# Altium PCB PCB robot V3.PCBDOC (part 2 of 3)
Units mm, origin at the board's own origin, x right, y up, seen from the top; angles counter-clockwise.
Board outline 299.72 x 199.9 mm, 2 copper layers (Top Layer, Bottom Layer); 127 components, 116 nets, 527 pads, 274 vias.
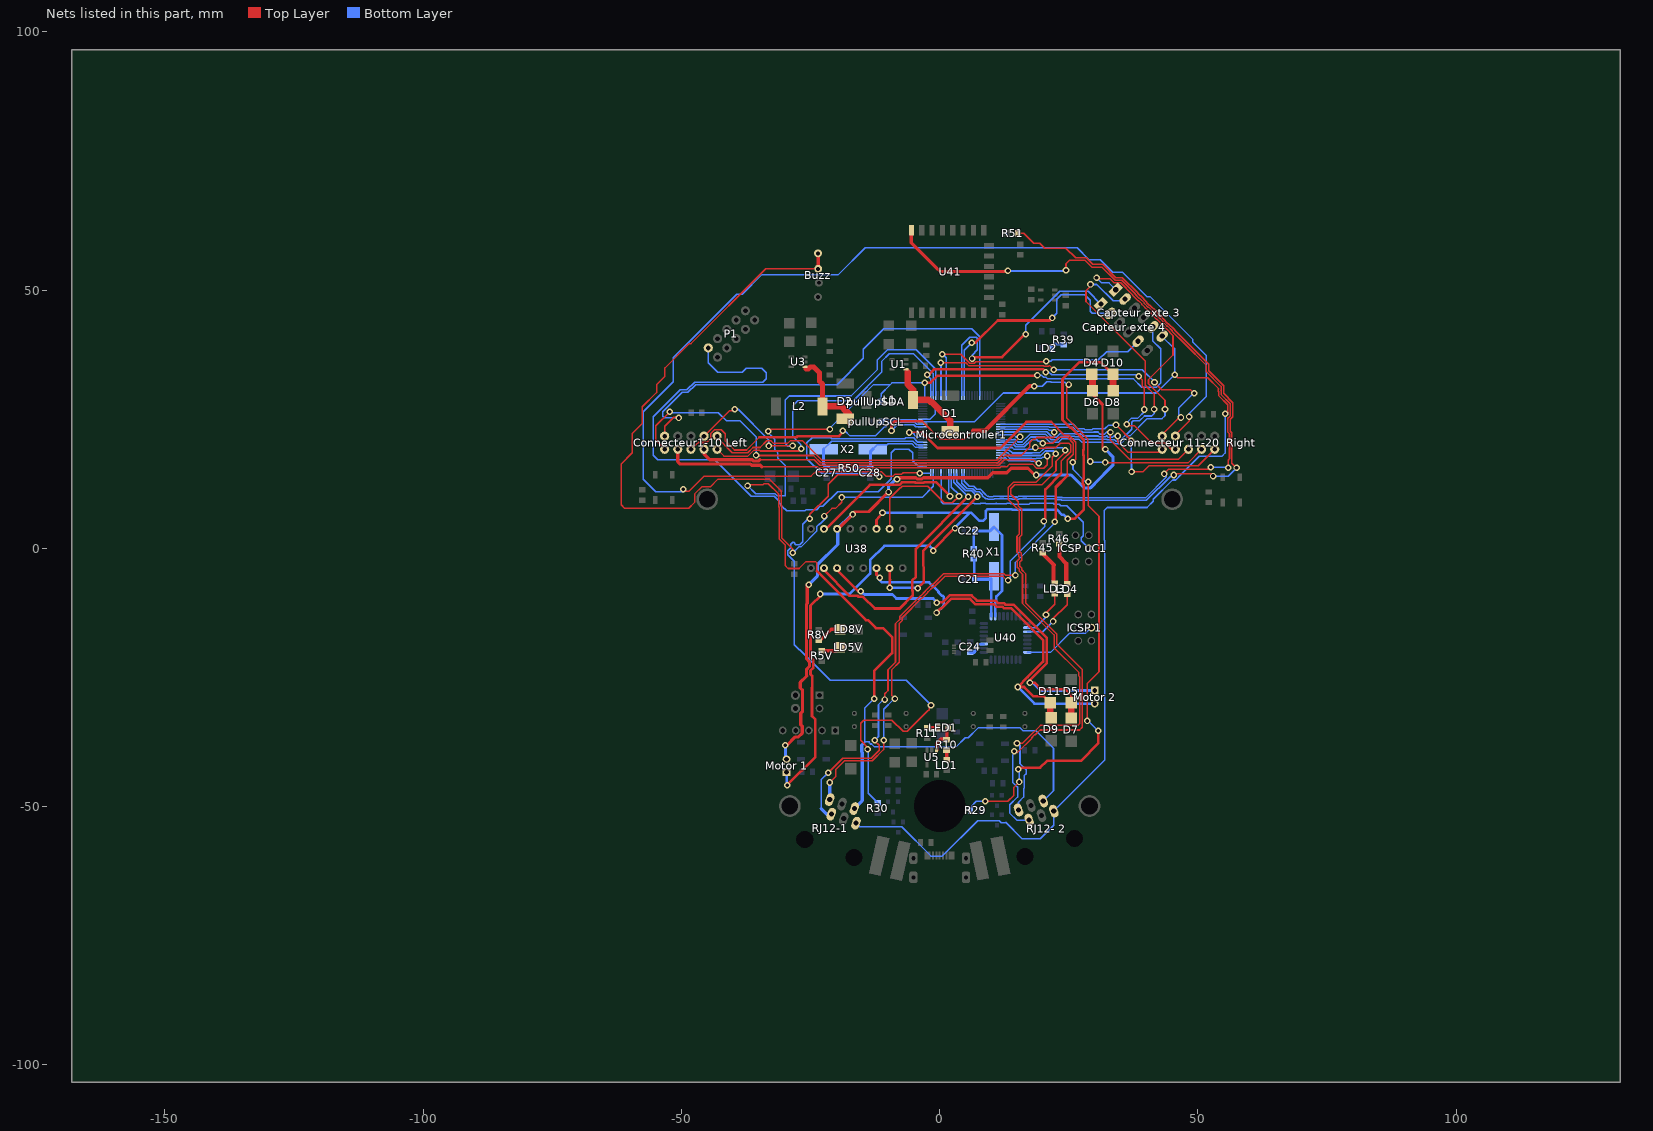
[diagram p2: the nets of this part, all layers, seen from the top]

## Via types
v1: diameter 1.27, hole 0.711, Top Layer to Bottom Layer, 274 vias

## Nets (pads, with @x,y where several pads share a name; then routed paths per layer and width w, separated by ;. In a path a pad name is that pad's centre, name@x,y a point inside that pad or via, vN(x,y) a via of type N, cw(c..) or ccw(c..) an arc to the next point about the centre after c; other vN are vias at no path point) (continued)
MOSI: "ICSP uC1.4" MicroController1.21 | length 40.7
  Bottom Layer w0.254: MicroController1.21@0.255,14.472 0.255,9.04 0.691,8.604 6.078,8.604 6.157,8.682 6.643,8.682 6.722,8.604 7.878,8.604 7.957,8.682 8.936,8.682 8.963,8.655 10.898,8.655 10.925,8.682 11.052,8.682 11.06,8.674 12.995,8.674 13.003,8.682 13.624,8.682 13.722,8.584 14.351,8.584 14.369,8.567 17.306,8.567 17.422,8.682 22.003,8.682 22.199,8.486 23.146,8.486 23.397,8.235 24.605,8.235 27.774,5.066 27.774,2.466 27.37,2.062 27.37,1.456 28.847,-0.021
"MOSI 16": "ICSP 1.4" U40.16 | length 14.4
  Bottom Layer w0.305: U40.16@16.958,-20.145 21.453,-20.145 25.138,-16.459 28.248,-16.459 29.361,-15.346
"MOTOR1 IN 1": MicroController1.18 U38.2 | length 33.8
  Top Layer w0.508: U38.2@-22.4,3.775 -22.049,3.775 -13.527,12.297 -8.727,12.297 -8.71,12.28 -7.815,12.28 -7.334,12.761 -4.764,12.761 -4.663,12.659 -3.107,12.659 -3.006,12.761 -0.666,12.761 v1(1.995,10.1)
  Bottom Layer w0.254: MicroController1.18@1.755,14.472 1.755,10.34 v1(1.995,10.1)
"MOTOR1 IN 2": MicroController1.17 U38.7 | length 27.2
  Top Layer w0.254: U38.7@-9.7,3.775 -9.7,9.667 -7.659,11.707 -7.577,11.707 -7.295,11.99 -2.278,11.99 0.891,8.821 2.461,8.821 v1(3.74,10.1)
  Bottom Layer w0.254: MicroController1.17@2.255,14.472 2.255,11.825 3.74,10.34 v1(3.74,10.1) v1@3.74,10.03
"MOTOR1 OUT+": "Motor 1.2" D4.1 D6.2 U38.3 | length 134.4
  Top Layer w0.381: v1@31.494,19.157 31.494,27.866
  Top Layer w0.508: v1@-16.527,7.107 -13.724,7.107
  Top Layer w0.605: v1@-29.496,-38.071 -27.929,-36.504 -27.341,-36.504 -26.611,-35.774 -26.611,-34.42 -26.89,-34.141 -26.89,-31.906 -26.543,-31.56 -26.543,-27.481 -26.936,-27.089 ; -26.985,-27.04 -26.985,-25.957 -25.738,-24.71 -25.751,-24.697 -25.751,-23.381 -25.238,-22.868 -25.238,-21.933 -25.751,-21.42 -25.751,-10.761 -25.642,-10.653 -25.642,-7.06 v1(-25.358,-7.06) ; U38.3@-19.86,3.775 -19.605,3.775 v1(-16.82,6.559) ; -13.724,7.107 v1@-10.031,10.801 ; v1(-8.263,13.361) -7.956,13.668 -4.613,13.668 -4.353,13.408 -3.417,13.408 -3.157,13.668 9.327,13.668 10.277,14.618 12.969,14.618 13.846,15.496 17.107,15.496 v1@18.455,14.148 ; D6.2@29.58,30.52 29.58,29.78 31.494,27.866
  Top Layer w1.27: D4.1@29.47,33.68 29.58,33.57 D6.2@29.58,30.52
  Bottom Layer w0.605: v1(-29.866,-38.095) -29.866,-40.594 -29.65,-40.81 ; v1(-25.358,-7.06) -23.685,-5.388 -23.685,-3.206 -19.733,0.747 U38.3@-19.733,3.647 ; U38.3@-19.86,3.775 -17.075,6.559 v1(-16.82,6.559) ; v1(-9.898,10.887) -9.898,12.02 v1@-8.622,13.296 ; v1(18.662,14.189) 25.45,14.189 27.934,11.705 29.226,11.705 29.915,12.394 29.915,12.445 33.522,16.051 33.522,17.748 v1@32.238,19.032
  other v1: 32.088,19.169
"MOTOR1 OUT-": "Motor 1.1" D8.2 D10.1 U38.6 | length 169.6
  Top Layer w0.508: v1(-29.521,-45.852) -24.12,-40.45 -24.12,-33.085 -24.72,-32.485 -24.72,-26.981 -24.679,-26.941 -24.679,-24.71 -25.003,-24.387 -25.003,-23.691 -24.49,-23.178 -24.49,-21.623 -25.003,-21.11 -25.003,-11.072 v1@-22.922,-8.991 ; U38.6@-12.24,3.775 -12.24,5.474 v1(-11.073,6.897) ; v1@-1.245,-0.209 v1@2.808,3.844 ; v1(24.798,5.717) 26.133,5.717 27.906,7.491 27.906,12.213 27.706,12.413 27.706,13.309 27.906,13.509 27.906,17.973 27.767,18.112 27.767,19.008 27.904,19.145 ; 27.904,19.145 27.906,19.148 27.906,20.934 25.526,23.315 25.303,23.315 23.775,24.843 23.775,32.737 27.079,36.041 31.169,36.041 D10.1@33.545,33.665
  Top Layer w1.27: D10.1@33.545,33.665 33.545,30.555 D8.2@33.58,30.52
  Bottom Layer w0.508: -29.65,-43.35 -29.57,-43.429 v1@-29.57,-45.458 ; v1(-23.095,-8.844) -17.412,-8.844 -13.446,-4.877 -13.446,-2.252 -10.712,0.482 -1.936,0.482 v1@-1.245,-0.209 ; v1(-11.073,6.897) 5.861,6.897 ; v1@2.808,3.844 5.861,6.897 ; v1(24.798,5.717) 24.041,6.475 23.722,6.475 22.725,7.471 14.029,7.471 13.93,7.569 9.253,7.569 8.951,7.267 8.951,5.869 8.441,5.359 7.644,5.359 6.107,6.897 5.861,6.897
  other v1: -1.268,-0.463 2.969,3.866
"MOTOR2 IN1": MicroController1.16 U38.10 | length 51
  Top Layer w0.508: U38.10@-22.4,-3.845 -22.4,-4.215 -17.415,-9.2 -15.918,-9.2 -15.715,-9.403 -14.819,-9.403 -12.569,-11.653 -7.732,-11.653 -5.222,-9.144 -5.222,-8.256 -5.331,-8.147 -5.331,-6.228 -4.619,-5.516 -4.619,-0.119 v1(5.5,10)
  Bottom Layer w0.254: MicroController1.16@2.755,14.472 2.755,12.745 v1(5.5,10)
"MOTOR2 IN2": MicroController1.15 U38.15 | length 38.7
  Top Layer w0.508: U38.15@-9.7,-3.845 U38.15@-9.7,-3.85 ; v1(-9.685,-7.612) -9.685,-6.185 -9.6,-6.1 -9.7,-6 U38.15@-9.7,-3.85 ; U38.15@-9.65,-3.8 U38.15@-9.7,-3.85 ; v1(-4.25,-7.699) -3.121,-6.569 -3.15,-0.45 v1(7.3,10)
  Bottom Layer w0.254: MicroController1.15@3.255,14.472 3.255,12.877 5.032,11.1 6.2,11.1 v1(7.3,10)
  Bottom Layer w0.508: v1(-9.685,-7.612) -4.337,-7.612 v1(-4.25,-7.699)
"MOTOR2 OUT+": "Motor 2.1" D5.1 D7.2 U38.11 | length 82.7
  Top Layer w0.508: U38.11@-19.86,-3.845 -19.86,-4.194 -15.732,-8.322 v1(-15.267,-8.322) ; v1@-0.175,-10.409 0.593,-10.409 1.915,-9.087 6.161,-9.087 7.218,-10.145 10.796,-10.145 11.249,-10.598 12.427,-10.598 12.745,-10.916 14.273,-10.916 20.725,-17.368 20.725,-22.231 17.471,-25.485 v1(17.471,-26.017) 18.327,-26.017 19.609,-27.3 24.364,-27.3 25.44,-28.376 D5.1@25.44,-29.905
  Top Layer w1.27: D7.2@25.44,-32.775 D5.1@25.44,-29.905
  Bottom Layer w0.508: -14.768,-8.739 -14.564,-8.943 -9.176,-8.943 -8.409,-9.71 -1.272,-9.71 v1@-0.481,-10.501 ; v1@17.872,-25.911 19.475,-27.514 30.001,-27.514
  other v1: -0.54,-10.559
"MOTOR2 OUT-": "Motor 2.2" D9.2 D11.1 U38.14 | length 82.6
  Top Layer w0.508: U38.14@-12.24,-3.845 -12.24,-5.099 v1(-11.625,-5.714) ; v1(-0.61,-12.463) 0.276,-11.577 0.416,-11.577 2.205,-9.787 5.871,-9.787 6.928,-10.845 10.506,-10.845 10.959,-11.298 12.137,-11.298 12.455,-11.616 13.876,-11.616 20.025,-17.765 20.025,-21.942 17.03,-24.936 17.024,-24.936 15.121,-26.84 v1(15.121,-26.846) 16.35,-26.846 18.14,-28.636 20.171,-28.636 D11.1@21.44,-29.905
  Top Layer w1.27: D9.2@21.44,-32.615 D11.1@21.44,-29.905
  Bottom Layer w0.508: v1@-11.804,-5.948 -11.219,-6.533 -9.238,-6.533 -9.197,-6.574 -2.023,-6.574 -0.226,-8.37 -0.226,-8.549 0.406,-9.182 0.585,-9.182 0.763,-9.359 0.763,-11.138 0.715,-11.138 v1(-0.61,-12.463) ; v1(15.121,-26.846) 18.329,-30.054 30.001,-30.054
NetBuzz_0: Buzz.0 MicroController1.24 pad.0 | length 156
  Top Layer w0.305: -59.304,22.43 -59.498,22.236 -59.498,18.502 -61.66,16.34 -61.66,8.416 -61.013,7.769 -48.563,7.769 -47.444,8.889 -47.444,10.513 -46.013,11.944 -44.389,11.944 -42.998,13.334 -32.884,13.334 -30.668,11.119 -30.668,10.35 -30.661,10.343 -30.661,8.251 -30.556,8.147 -30.556,2 -28.428,-0.128 v1(-28.428,-0.877) ; -59.304,22.431 -57.583,24.151 -57.583,27.386 -54.8,30.169 -54.8,31.686 -53.194,33.292 -53.194,34.91 -48.472,39.633 -48.132,39.633 -33.662,54.103 pad.0@-23.515,54.103 ; v1(-22.357,6.243) -20.868,7.731 -20.179,7.731 -18.976,8.934 v1(-18.976,9.853)
  Top Layer w0.635: pad.0@-23.515,54.103 Buzz.0@-23.515,57.048
  Bottom Layer w0.305: v1(-28.428,-0.877) -27.28,0.271 -26.869,0.271 -23.836,3.304 -23.836,4.169 -23.237,4.767 -23.108,4.767 -21.859,6.016 -22.086,6.243 v1(-22.357,6.243) ; v1(-18.976,9.853) -3.391,9.853 -1.245,11.999 MicroController1.24@-1.245,14.472
NetC21_1: C21.1 R40.1 U40.1 X1.1 | length 14.5
  Bottom Layer w0.5: R40.1@6.595,-2.053 6.719,-2.177 C21.1@6.719,-5.983 ; U40.1@9.958,-13.145 X1.1@9.958,-5.931
  Bottom Layer w0.635: C21.1@6.719,-5.983 9.906,-5.983 X1.1@9.958,-5.931
NetC22_1: C22.1 R40.2 U40.2 X1.2 | length 26
  Bottom Layer w0.5: R40.2@6.595,-0.021 6.595,3.237 C22.1@6.719,3.361
  Bottom Layer w0.508: X1.2@10.509,4.12 12.059,2.571 12.059,-8.218 10.961,-9.315 10.961,-9.965 10.758,-10.168 U40.2@10.758,-13.145
  Bottom Layer w0.635: C22.1@6.719,3.361 9.75,3.361 X1.2@10.509,4.12
NetC24_2: C24.2 U40.27 | length 3.7
  Bottom Layer w0.508: 7.01,-19.049 7.515,-18.545 U40.27@8.558,-18.545
  Bottom Layer w0.635: C24.2@5.915,-20.113 6.677,-20.113 7.01,-19.78 7.01,-19.049
NetC27_1: C27.1 MicroController1.34 R50.2 X2.2 | length 27.3
  Bottom Layer w0.305: X2.2@-22.473,19.158 -20.906,20.725 -10.166,20.725 -8.113,20.725 -8.112,20.724 -5.149,20.724 -4.455,20.029 -3.302,20.029 MicroController1.34@-3.295,20.022
  Bottom Layer w0.635: X2.2@-22.473,19.158 -22.473,16.183 C27.1@-21.895,15.604 -21.768,15.477 R50.2@-18.547,15.477
NetC28_1: C28.1 MicroController1.33 R50.1 X2.1 | length 17.3
  Bottom Layer w0.305: X2.1@-12.973,19.158 -12.095,20.035 -10.156,20.035 -9.961,20.23 -8.318,20.23 -8.317,20.229 -5.364,20.229 -4.67,19.535 -4.254,19.535 -4.249,19.529 -3.502,19.529 -3.5,19.527 -3.3,19.527 MicroController1.33@-3.295,19.522
  Bottom Layer w0.635: R50.1@-16.515,15.477 -13.53,15.477 C28.1@-13.403,15.604 -13.403,18.728 X2.1@-12.973,19.158
"NetCapteur exte 1_1": MicroController1.93 RJ12-1.1 | length 115
  Top Layer w0.305: v1(-21.29,-45.331) -20.155,-44.197 -20.155,-42.84 -18.437,-41.122 -13.037,-41.122 -10.861,-38.946 -10.861,-37.521 v1@-10.598,-37.258 ; v1(-8.668,-29.095) -9.252,-28.511 -9.252,-23.471 -7.85,-22.07 -7.85,-14.564 -7.248,-13.962 -7.248,-13.421 -3.499,-9.672 -3.433,-9.672 -2.277,-8.516 -2.277,-8.45 -1.264,-7.437 -1.041,-7.437 0.959,-5.436 12.253,-5.436 v1@13.193,-6.375 ; v1(18.531,19.514) 18.686,19.359 20.33,19.359 20.485,19.514 22.479,19.514 23.326,20.361 25.021,20.361 25.367,20.015 25.367,18.7 24.688,18.022 24.637,18.022 23.516,16.901 23.516,14.51 ; v1(20.178,5.25) v1@20.436,5.508
  Top Layer w0.5: v1@20.436,5.508 20.436,11.43 23.516,14.51
  Bottom Layer w0.305: v1(-10.813,-37.132) -10.813,-31.152 -8.925,-29.263 v1@-8.701,-29.263 ; MicroController1.93@11.805,19.522 14.024,19.522 14.4,19.146 18.163,19.146 v1(18.531,19.514) v1@18.531,19.978 ; v1@13.621,-6.068 13.621,-2.486 20.319,4.212 v1@20.319,5.077
  Bottom Layer w0.635: v1(-21.29,-45.331) RJ12-1.1@-21.29,-48.643 RJ12-1.1@-20.869,-48.643
  other v1: 13.237,-6.211
"NetCapteur exte 1_2": MicroController1.92 RJ12-1.2 | length 122.6
  Top Layer w0.254: v1(19.924,20.338) 21.929,20.338 23.06,21.469 24.761,21.469 25.883,20.347 25.883,19.814 25.877,19.808 25.877,18.755 25.883,18.749 25.883,18.216 24.736,17.069 24.736,14.103
  Top Layer w0.305: v1(-21.571,-43.419) -18.777,-40.625 -13.243,-40.625 -11.701,-39.084 -11.701,-38.142 -12.56,-37.283 v1(-12.56,-37.121) ; v1(-10.645,-29.272) -10.645,-28.166 -10.009,-27.53 -10.009,-23.526 -8.56,-22.076 -8.56,-14.571 -7.745,-13.756 -7.745,-13.216 -3.705,-9.175 -3.639,-9.175 -2.774,-8.31 -2.774,-8.244 -1.469,-6.94 -1.247,-6.94 0.753,-4.939 12.459,-4.939 12.731,-5.211 v1(14.66,-5.211)
  Top Layer w0.5: v1@22.462,5.143 22.462,11.829
  Top Layer w0.55: 22.462,11.829 24.736,14.103
  Bottom Layer w0.254: MicroController1.92@11.805,20.022 14.33,20.022 14.736,19.615 16.345,19.615 17.791,21.061 18.794,21.061 19.116,20.739 19.612,20.739 v1@20.084,20.268
  Bottom Layer w0.305: -22.959,-50.38 -22.959,-44.807 v1(-21.571,-43.419) ; v1@-12.529,-37.152 v1(-12.56,-37.121) -12.513,-37.121 -11.791,-36.399 -11.84,-36.35 -11.84,-30.251 v1@-10.745,-29.156 ; v1@14.659,-5.255 14.659,-2.722 v1@22.524,5.143
  Bottom Layer w0.635: -22.959,-50.38 -21.879,-51.46 RJ12-1.2@-20.974,-51.46
  other v1: 22.256,5.175
"NetCapteur exte 1_5": "Capteur exte 3.5" "RJ12- 2.5" MicroController1.44 pullUpSDA.2 RJ12-1.5 | length 267.1
  Top Layer w0.305: v1@-37.193,12.317 -34.195,12.317 -33.987,12.524 -33.175,12.524 -31.21,10.559 -31.21,10.189 ; v1@-33.304,22.747 -32.984,23.067 v1(-21.248,23.067) ; -31.158,10.137 -31.158,8.046 -31.053,7.941 -31.053,1.794 -29.866,0.607 -29.866,-3.382 -29.344,-3.904 -27.222,-3.904 -25.888,-2.57 -24.033,-2.57 -23.763,-2.841 -23.763,-4.408 ; v1@18.442,33.403 v1@18.787,33.747
  Top Layer w0.5: -23.763,-4.408 -14.27,-13.9 -13.91,-13.9 -12.356,-15.453 -10.944,-15.453 -9.188,-17.21 -9.188,-20.276 -12.696,-23.785 v1(-12.696,-29.109) ; v1(-2.867,32.079) -1.776,32.079 -0.448,33.408 15.568,33.408 15.573,33.403 v1@18.442,33.403
  Bottom Layer w0.305: v1(-37.194,12.14) -35.622,10.568 -33.176,10.568 -33.17,10.573 -31.879,10.573 -31.45,10.144 -29.912,10.144 -29.894,10.162 -29.894,16.02 -31.384,17.509 -31.384,18.532 -31.943,19.091 -31.943,21.12 -33.635,22.812 -33.635,22.846 -33.46,22.671 v1(-33.199,22.671) ; v1@-21.248,23.28 -12.894,31.634 -9.616,31.634 ; -14.967,-37.99 -14.499,-37.522 ; v1(-12.696,-29.109) -14.499,-30.912 -14.499,-37.522 ; pullUpSDA.2@-11.335,28.404 -11.335,29.915 -9.616,31.634 ; MicroController1.44@-3.295,25.022 -1.835,25.022 -0.871,25.986 -0.871,27.168 -2.867,29.165 v1(-2.867,32.079) -2.93,32.017 -9.233,32.017 -9.616,31.634 ; v1(18.918,33.518) 19.731,33.518 20.123,33.126 20.587,33.126 20.916,32.798 37.518,32.798 39.125,31.191 41.989,31.191 42.784,31.986 42.784,38.622 41.25,40.157 41.25,42.819 ; 20.035,-48.912 22.024,-46.923 22.024,-38.688 18.678,-35.342 16.151,-35.342 15.573,-34.764 7.427,-34.764 5.525,-36.666 4.951,-36.666 3.167,-38.45 -12.614,-38.45 -13.192,-37.872 -13.415,-37.872 -13.649,-37.638 -13.649,-37.415 -13.652,-37.412 -14.389,-37.412 -14.499,-37.522
  Bottom Layer w0.635: RJ12-1.5@-16.516,-50.38 -14.967,-48.831 -14.967,-39.529 -15.108,-39.388 -15.108,-38.131 -14.967,-37.99
"NetCapteur exte 1_6": "Capteur exte 3.6" "RJ12- 2.6" MicroController1.43 pullUpSCL.2 RJ12-1.6 | length 231.8
  Top Layer w0.305: v1(45.49,33.631) 46.097,33.024 51.872,33.024 53.981,30.916 53.981,30.846 53.946,30.812 53.946,30.4 53.981,30.365 53.981,29.587 55.767,27.802 v1@55.767,26.078
  Bottom Layer w0.305: RJ12-1.6@-16.201,-53.198 -15.49,-53.909 -7.36,-53.909 -1.695,-59.574 0.497,-59.574 7.352,-52.719 7.37,-52.737 11.55,-52.737 11.82,-53.007 11.82,-53.096 12.702,-53.096 ; pullUpSCL.2@-11.309,24.526 -10.916,24.92 -4.639,24.92 -4.246,24.527 -3.3,24.527 MicroController1.43@-3.295,24.522 6.754,24.522 12.293,30.061 41.92,30.061 v1(45.49,33.631) 45.49,38.723 45.346,38.723 43.046,41.023 ; 12.769,-53.03 15.947,-56.208 19.463,-56.208 22.088,-53.584 22.088,-50.868 31.975,-40.98 31.975,1.501 31.888,1.589 31.888,7.346 32.44,7.899 40.151,7.899 41.354,9.102 41.354,9.493 45.084,13.223 45.705,13.223 46.277,13.795 46.277,13.877 50.222,17.822 54.632,17.822 55.25,18.44 v1(55.25,26.025)
"NetCapteur exte 2_1": "RJ12- 2.1" MicroController1.95 | length 103.7
  Top Layer w0.305: v1(14.965,-37.741) 16.046,-37.741 17.303,-36.485 17.303,-36.477 19.495,-34.284 26.753,-34.284 27.077,-33.96 27.077,-24.834 26.889,-24.647 26.889,-23.961 22.15,-19.222 22.15,-16.777 16.033,-10.66 16.033,-5.04 15.379,-4.386 15.379,-4.017 15.024,-3.662 15.024,-2.44 15.379,-2.085 15.379,-1.658 15.315,-1.593 15.315,-1.125 14.959,-0.77 14.959,2.357 15.379,2.777 15.379,7.341 13.242,9.478 13.242,11.749 14.316,12.823 18.682,12.823 21.811,15.953 21.811,17.64 v1(22.486,18.315)
  Bottom Layer w0.305: MicroController1.95@11.805,18.522 12.656,18.522 12.662,18.517 13.156,18.517 13.711,17.962 18.547,17.962 18.551,17.966 19.547,17.966 20.427,18.846 22.119,18.846 ; v1@15.208,-37.813 15.552,-38.156 15.552,-41.69 16.743,-42.882 16.743,-43.629 16.393,-43.979 16.393,-46.383 16.241,-46.534 16.241,-48.16 15.261,-49.14 15.261,-50.65
"NetCapteur exte 2_2": "RJ12- 2.2" MicroController1.94 | length 112.4
  Top Layer w0.305: v1@14.915,-39.543 15.054,-39.543 17.8,-36.797 17.8,-36.683 18.373,-36.109 18.487,-36.109 19.428,-35.168 27.06,-35.168 27.574,-34.655 27.574,-23.466 22.647,-18.539 22.647,-16.571 16.624,-10.548 16.624,-4.881 15.876,-4.133 15.876,-3.811 15.521,-3.457 15.521,-2.645 15.876,-2.291 15.876,-1.452 15.812,-1.388 15.812,-0.92 15.456,-0.564 15.456,2.151 15.876,2.571 15.876,7.546 15.206,8.216 15.206,9.016 13.738,10.485 13.738,11.543 14.521,12.326 19.82,12.326 22.518,15.024 22.518,16.849 v1@24.492,18.823
  Bottom Layer w0.254: MicroController1.94@11.805,19.022 13.469,19.022 14.034,18.457
  Bottom Layer w0.305: 14.018,18.457 14.034,18.457 17.868,18.457 ; 14.116,-43.459 14.116,-45.308 15.013,-46.204 15.072,-46.204 15.072,-48.147 13.565,-49.654 13.526,-49.654 13.526,-51.222 14.909,-52.606 17.314,-52.606 ; 14.136,-43.642 14.136,-39.951 ; 17.868,18.461 19.342,18.461 20.222,19.341 22,19.341 22.099,19.439 23.845,19.439 v1(24.282,19.001)
  other v1: 14.409,-39.268
"NetCapteur exte 3_1": "Capteur exte 3.1" MicroController1.91 | length 78.8
  Top Layer w0.305: v1@30.638,52.221 32.92,52.221 33.754,51.387 35.035,51.387 37.345,49.077 37.345,48.973 38.389,47.929 38.493,47.929 39.141,47.281 39.141,47.177 40.185,46.133 40.289,46.133 40.937,45.485 40.937,45.381 41.981,44.337 42.085,44.337 42.733,43.689 42.733,43.585 43.777,42.541 43.881,42.541 44.529,41.893 44.529,41.789 45.157,41.161 45.157,37.406 40.414,32.663 40.414,31.871 43.61,28.675 v1(43.61,26.932)
  Bottom Layer w0.305: MicroController1.91@11.805,20.522 14.494,20.522 14.931,20.085 16.15,20.085 17.621,21.555 20.337,21.555 21.37,20.522 23,20.522 23.686,21.209 25.894,21.209 25.96,21.142 26.927,21.142 27.556,20.513 33.617,20.513 33.858,20.272 35.078,20.272 36.571,21.765 36.83,21.765 40.184,25.118 43.057,25.118 43.61,25.672 v1(43.61,26.932) ; v1(30.368,52.355) 31.349,51.374 32.776,51.374 34.089,50.062
"NetCapteur exte 3_2": "Capteur exte 3.2" MicroController1.90 | length 73.9
  Top Layer w0.305: v1@29.673,51.203 28.316,49.846 28.316,47.771 39.807,36.28 39.807,31.552 41.494,29.865 v1(41.494,26.939)
  Bottom Layer w0.305: MicroController1.90@11.805,21.022 14.294,21.022 14.334,21.062 14.653,21.062 15.136,20.58 15.945,20.58 17.416,22.05 20.542,22.05 21.575,21.017 22.795,21.017 23.482,21.703 26.099,21.703 26.165,21.637 27.132,21.637 27.681,21.087 32.317,21.087 32.338,21.108 32.439,21.008 33.822,21.008 34.063,20.767 34.873,20.767 37.176,23.069 37.176,24.406 37.448,24.678 38.694,24.678 39.635,25.619 41.046,25.619 41.494,26.066 v1(41.494,26.939) ; v1(29.194,51.078) 30.425,51.078 33.595,47.908 35.527,47.908 35.885,48.266
"NetCapteur exte 4_1": "Capteur exte 4.1" MicroController1.63 | length 50.5
  Top Layer w0.254: v1(6.26,36.737) v1@6.522,36.999
  Top Layer w0.5: v1@6.522,36.999 12.084,36.999 v1@16.732,41.647
  Bottom Layer w0.254: MicroController1.63@4.255,29.572 4.255,39.333 5.827,40.905 7.101,40.905 7.308,40.698 7.308,38.406 6.26,37.357 v1(6.26,36.737) ; v1(16.669,41.43) 16.669,43.164 23.268,49.763 28.727,49.763 31.211,47.279
"NetCapteur exte 4_2": "Capteur exte 4.2" MicroController1.64 | length 45.8
  Top Layer w0.254: v1(6.23,39.807) 6.942,39.807 ; 21.287,44.105 v1(21.775,44.593)
  Top Layer w0.5: 6.942,39.807 11.24,44.105 21.287,44.105
  Bottom Layer w0.254: MicroController1.64@4.755,29.572 4.755,38.333 v1(6.23,39.807) ; v1(21.775,44.593) 22.664,45.483 22.664,48.244 23.54,49.12 28.048,49.12 29.132,48.036 29.132,45.928 29.577,45.483 33.007,45.483
"NetCapteur exte 4_5": "Capteur exte 4.5" MicroController1.57 | length 49.2
  Top Layer w0.254: v1(0.488,37.578) 4.067,37.578 5.864,35.782 6.656,35.782 6.948,36.074 v1@21.083,36.074
  Bottom Layer w0.254: v1@0.506,37.65 1.255,36.901 MicroController1.57@1.255,29.572 ; v1(20.618,36.199) 21.461,36.199 21.742,36.479 30.712,36.479 32.291,38.058 36.36,38.058 38.396,40.094
"NetConnecteur1-10 Left_1": "Connecteur1-10 Left.1" MicroController1.52 | length 65.1
  Top Layer w0.305: -43.08,19.18 -41.751,17.851 -37.12,17.851 -35.957,19.014 -34.947,19.014 -34.776,18.843 -27.182,18.843 v1(-26.771,19.255)
  Bottom Layer w0.305: v1(-26.771,19.255) -26.866,19.35 -26.866,20.049 -28.454,21.638 -28.454,27.569 -27.453,28.57 -16.735,28.57 -11.245,34.06 -11.245,36.185 -9.76,37.67 -5.077,37.67 -1.245,33.838 MicroController1.52@-1.245,29.572
"NetConnecteur1-10 Left_2": "Connecteur1-10 Left.2" MicroController1.88 | length 68.9
  Top Layer w0.305: -43.226,21.72 -43.08,21.72 -43.08,21.455 -40.139,18.514 -37.159,18.514 -36.163,19.511 -34.779,19.511 -33.487,20.802 -32.676,20.802 -32.253,20.379 -29.373,20.379 -28.891,20.862 -28.079,20.862 -28.022,20.805 -26.549,20.805 -22.799,17.055 11.038,17.055 v1(15.54,21.557)
  Bottom Layer w0.305: MicroController1.88@11.805,22.022 14.287,22.022 14.751,21.557 v1(15.54,21.557)
"NetConnecteur1-10 Left_3": "Connecteur1-10 Left.3" MicroController1.97 | length 76.7
  Top Layer w0.305: -34.836,17.131 -24.28,17.131 -23.211,16.061 11.45,16.061 12.52,17.131 13.849,17.131 ; 12.748,17.126 18.179,17.126 18.811,16.494 v1(19.161,16.494)
  Top Layer w0.635: -45.62,19.18 -45.62,18.223 -44.528,17.131 -36.267,17.131 -36.026,16.89 -35.077,16.89 -34.836,17.131
  Bottom Layer w0.305: MicroController1.97@11.805,17.522 12.752,17.522 13.346,16.927 17.627,16.927 17.727,16.828 18.908,16.828 v1@19.39,16.346
"NetConnecteur1-10 Left_4": "Connecteur1-10 Left.4" MicroController1.53 | length 73.7
  Top Layer w0.305: -45.62,21.72 -40.703,26.636 -39.981,26.636 v1(-39.692,26.926) ; v1@-33.082,19.883 v1(-28.485,19.883)
  Bottom Layer w0.305: v1(-39.692,26.926) -39.017,26.926 -33.082,20.99 v1(-33.082,19.823) ; v1@-28.741,19.764 -29.392,19.764 -29.866,20.238 -29.866,28.76 -29.139,29.487 -17.161,29.487 -12.05,34.599 -12.05,36.515 -10.107,38.458 -4.551,38.458 -0.745,34.652 MicroController1.53@-0.745,29.572
"NetConnecteur1-10 Left_5": "Connecteur1-10 Left.5" MicroController1.42 | length 52.8
  Top Layer w0.305: -48.16,19.18 -48.023,19.18 -46.716,20.487 -45.109,20.487 -44.313,21.282 -44.313,22.231 -43.591,22.953 -42.286,22.953 -41.517,22.184 -41.517,20.82 -39.725,19.029 -37.387,19.029 -34.884,21.532 ; v1@-18.794,22.407 v1(-18.794,22.757)
  Top Layer w0.5: -34.884,21.532 -27.701,21.532 -27.501,21.732 -19.469,21.732 v1@-18.794,22.407
  Bottom Layer w0.305: v1(-18.794,22.757) -18.385,22.757 -17.385,21.756 -12.454,21.756 -10.662,23.549 -10.459,23.549 -9.583,24.425 -4.844,24.425 -4.441,24.022 MicroController1.42@-3.295,24.022
"NetConnecteur1-10 Left_7": "Connecteur1-10 Left.7" MicroController1.96 | length 86.5
  Top Layer w0.305: -34.431,15.76 -23.611,15.76 -23.416,15.565 11.656,15.565 11.851,15.76 12.961,15.76 13.506,16.304 17.966,16.304 18.755,15.515 20.149,15.515 20.832,16.198 v1(20.832,17.869)
  Top Layer w0.635: -50.7,19.18 -50.7,16.789 -50.215,16.304 -36.609,16.304 -36.368,16.063 -34.735,16.063 -34.431,15.76
  Bottom Layer w0.305: MicroController1.96@11.844,18.022 12.951,18.022 13.506,17.467 17.787,17.467 17.932,17.323 18.607,17.323 18.756,17.471 19.566,17.471 19.57,17.467 19.748,17.467 19.942,17.661 20.625,17.661 v1(20.832,17.869)
"NetConnecteur1-10 Left_9": "Connecteur1-10 Left.9" MicroController1.86 | length 103.6
  Top Layer w0.305: -53.24,19.18 -54.972,20.911 -54.972,23.708 v1(-52.227,26.453) ; v1@-35.367,17.965 -24.412,17.965 -23.005,16.558 11.244,16.558 12.652,17.965 15.766,17.965 17.421,19.62 17.421,20.515 17.994,21.089 18.454,21.089 18.82,21.455 21.984,21.455 22.185,21.656 v1(22.185,22.489)
  Bottom Layer w0.305: v1@-52.296,26.268 -42.843,26.268 -41.232,24.658 -38.603,24.658 -35.552,21.606 v1(-35.552,18.035) ; MicroController1.86@11.805,23.022 14.923,23.022 14.931,23.029 16.995,23.029 17.006,23.04 20.952,23.04 21.169,22.823 21.851,22.823 v1(22.185,22.489)
"NetConnecteur1-10 Left_10": "Connecteur1-10 Left.10" MicroController1.70 | length 90.9
  Top Layer w0.254: -53.24,21.72 -53.24,23.597 -51.474,25.364 v1@-50.703,25.364
  Bottom Layer w0.254: -53.628,22.107 -53.24,21.72 ; v1(-50.526,25.238) -53.255,25.238 -53.628,25.611 -53.628,26.403 -49.827,30.204 -48.744,30.204 -47.25,31.698 -19.856,31.698 -14.784,36.77 -14.784,38.581 -10.836,42.53 6.223,42.53 7.755,40.997 MicroController1.70@7.755,29.572
"NetConnecteur 11-20  Right_1": "Connecteur 11-20  Right.1" MicroController1.84 | length 50.4
  Top Layer w0.305: v1@34.452,23.586 v1@37.006,21.032 ; v1(37.136,14.814) 39.369,14.814 40.528,15.973 50.033,15.973 53.24,19.18
  Bottom Layer w0.305: MicroController1.84@11.805,24.022 16.588,24.022 16.596,24.029 21.362,24.029 21.369,24.022 25.948,24.022 25.948,23.954 26.78,23.121 27.958,23.121 28.091,22.988 29.551,22.988 29.706,23.142 31.95,23.142 32.657,23.849 v1@33.835,23.849 ; v1(37.072,20.787) 37.072,16.397 37.136,16.332 v1(37.136,14.814)
  other v1: 34.125,23.887
"NetConnecteur 11-20  Right_3": "Connecteur 11-20  Right.3" MicroController1.41 | length 87.7
  Top Layer w0.305: -3.384,24.588 0.059,21.145 4.838,21.145 6.452,22.758 ; v1(25.004,31.702) 24.569,31.267 24.569,29.415 24.556,29.402 24.556,25.273 28.663,21.167 28.663,17.291 v1(29.148,16.806) ; v1@32.415,16.538 48.058,16.538 50.7,19.18
  Top Layer w0.5: v1(-9.329,22.771) -9.329,23.987 -8.728,24.588 -3.384,24.588
  Top Layer w0.8: 6.452,22.758 8.792,22.758 17.423,31.39 v1(18.334,31.39)
  Bottom Layer w0.305: v1(-9.329,22.771) -8.197,23.904 -5.022,23.904 -4.646,23.527 -3.3,23.527 MicroController1.41@-3.295,23.522 ; v1(18.334,31.39) 19.863,31.39 20.719,32.245 21.528,32.245 21.6,32.173 24.203,32.173 v1@24.661,31.715 ; v1(29.148,16.806) 29.331,16.623 v1(32.019,16.623)
"NetConnecteur 11-20  Right_5": "Connecteur 11-20  Right.5" MicroController1.85 | length 40.8
  Top Layer w0.305: v1(33.048,22.48) 33.048,20.946 36.731,17.264 46.244,17.264 48.16,19.18
  Bottom Layer w0.305: MicroController1.85@11.805,23.522 11.807,23.524 16.79,23.524 16.801,23.535 21.157,23.535 21.225,23.466 25.735,23.466 26.575,22.626 27.542,22.626 27.675,22.493 29.756,22.493 29.784,22.521 30.653,22.521 31.089,22.085 31.915,22.085 32.351,22.521 v1@32.837,22.521
"NetConnecteur 11-20  Right_7": "Connecteur 11-20  Right.7" MicroController1.51 | length 69.7
  Top Layer w0.305: 20.001,34.63 v1(20.528,34.103) ; v1@36.043,23.689 37.74,23.689 41.015,20.414 43.591,20.414 44.826,19.18 45.62,19.18 ; v1(38.544,33.282) 39.18,32.645 39.18,31.377 39.339,31.218 ; 39.186,31.393 39.582,30.998 v1(39.582,26.879)
  Top Layer w0.5: v1@-1.993,33.748 -1.111,34.63 20.001,34.63
  Bottom Layer w0.305: v1@-2.762,33.282 -2.176,33.282 -1.745,32.851 MicroController1.51@-1.745,29.572 ; v1(20.528,34.103) 21.161,34.103 21.673,33.59 v1@38.573,33.59 ; v1(36.199,24.001) 35.941,24.001 37.149,25.209 38.377,25.209 39.582,26.414 v1(39.582,26.879)
  other v1: -2.398,33.593
"NetConnecteur 11-20  Right_8": "Connecteur 11-20  Right.8" MicroController1.25 | length 223.2
  Top Layer w0.305: v1@-49.245,11.061 -48.518,11.061 -45.596,13.983 -24.89,13.983 -24.087,14.786 -23.275,14.786 -23.203,14.858 -11.297,14.858 -10.422,13.983 -9.026,13.983 -8.668,14.341 -7.857,14.341 -7.831,14.315 -7.374,14.315 -7.074,14.615 -3.963,14.615 v1(-3.885,14.537) ; 45.62,21.72 45.62,21.943 48.278,24.601 v1(48.278,25.447)
  Bottom Layer w0.305: v1@-49.557,10.967 -54.968,10.967 -57.369,13.368 -57.369,26.454 -51.601,32.222 -51.601,36.884 -39.305,49.18 -38.221,49.18 -34.413,52.988 -19.601,52.988 -14.4,58.188 26.618,58.188 28.923,55.883 31.094,55.883 33.513,53.464 35.369,53.464 40.163,48.67 40.8,48.67 49.026,40.444 49.026,39.889 51.584,37.331 51.584,29.409 v1@48.005,25.83 ; v1(-3.885,14.537) MicroController1.25@-1.811,14.537
  other v1: -49.619,11.434
"NetConnecteur 11-20  Right_9": "Connecteur 11-20  Right.9" MicroController1.87 | length 35
  Top Layer w0.305: v1@34.28,21.556 v1(34.468,21.744) 34.468,20.568 36.413,18.624 42.524,18.624 43.08,19.18
  Bottom Layer w0.305: MicroController1.87@11.805,22.522 15.123,22.522 15.136,22.534 17.2,22.534 17.211,22.545 20.747,22.545 21.78,21.512 22.59,21.512 23.277,22.198 26.304,22.198 26.37,22.132 27.337,22.132 27.724,21.744 30.73,21.744 30.892,21.582 32.112,21.582 32.274,21.744 32.402,21.744 32.644,21.503 33.453,21.503 33.695,21.744 v1(34.468,21.744)
"NetConnecteur 11-20  Right_10": "Connecteur 11-20  Right.10" MicroController1.55 | length 70.1
  Top Layer w0.305: v1(0.208,35.944) 5.034,35.944 5.669,35.309 20.122,35.309 20.212,35.219 21.024,35.219 21.114,35.309 21.341,35.309 v1(22.08,34.57) ; v1(41.584,32.168) 41.584,32.078 42.963,30.699 48.568,30.699 v1(49.264,30.002) v1@49.118,30.002 ; 43.08,21.72 43.08,22.053 46.305,25.278 46.305,25.635 46.615,25.325 v1(46.698,25.325)
  Bottom Layer w0.305: v1@0.186,35.77 0.255,35.701 MicroController1.55@0.255,29.572 ; v1(22.08,34.57) 39.217,34.57 v1@41.659,32.128 ; v1(46.698,25.325) 46.615,25.325 46.305,25.635 46.305,27.189 49.118,30.002 v1(49.264,30.002)
NetD1_2: D1.2 L1.2 U1.1 | length 16.7
  Top Layer w1.27: -6.188,34.109 -6.188,31.729 -5.152,30.693 L1.2@-5.152,28.727 -2.176,28.727 -1.829,28.38 -1.598,28.38 2.007,24.775 D1.2@2.007,22.714
NetD2_2: D2.2 L2.2 U3.1 | length 17.3
  Top Layer w1: -25.829,34.764 -25.383,34.764 -25.031,35.116 -24.37,35.116 -23.249,33.994 -23.249,32.334 -22.698,31.784 L2.2@-22.698,27.479
  Top Layer w1.27: L2.2@-22.698,27.479 -19.03,27.479 -18.56,27.009 -18.56,26.984 -17.478,25.903 D2.2@-17.478,24.384
NetLD1_K: LD1.K R10.1 | length 1.8
  Top Layer w0.635: LD1.K@1.375,-40.939 R10.1@1.375,-39.138
NetLD2_K: LD2.K R39.1 | length 2.2
  Bottom Layer w0.635: LD2.K@21.761,39.053 22.261,39.553 R39.1@23.761,39.553
NetLD3_A: LD3.A R45.1 | length 6
  Top Layer w0.8: R45.1@19.979,-1.099 22.101,-3.221 ; 22.063,-6.247 22.063,-3.26
NetLD3_K: LD3.K U40.10 | length 9.5
  Top Layer w0.254: v1@20.415,-12.649 22.255,-10.809 LD3.K@22.255,-8.798
  Bottom Layer w0.254: U40.10@16.958,-15.345 18.484,-15.345 20.582,-13.247 v1(20.582,-12.865)
NetLD4_A: LD4.A R46.1 | length 8.3
  Top Layer w0.305: LD4.A@24.488,-6.697 LD4.A@24.659,-6.868
  Top Layer w0.8: R46.1@23.17,0.848 23.17,-1.608 24.488,-2.926 LD4.A@24.488,-6.697
NetLD4_K: LD4.K U40.11 | length 11.8
  Top Layer w0.254: v1@21.824,-13.725 24.659,-10.89 LD4.K@24.659,-8.9
  Bottom Layer w0.254: U40.11@16.958,-16.145 19.954,-16.145 v1(21.943,-14.155)
NetLD5V_A: LD5V.A R5V.1 | length 3.8
  Top Layer w0.635: R5V.1@-22.869,-19.806 -20.042,-19.806 LD5V.A@-19.387,-19.15
NetLD8V_A: LD8V.A R8V.1 | length 5
  Top Layer w0.635: R8V.1@-23.407,-17.791 -23.158,-17.791 -21.009,-15.642 LD8V.A@-19.28,-15.642
NetLED1_A: LED1.A R10.2 U5.1 | length 6
  Top Layer w0.635: U5.1@-0.589,-39.063 -0.589,-37.699 0.165,-36.945 1.424,-36.945 1.431,-36.938 LED1.A@1.431,-34.673
NetLED1_K: LED1.K R11.1 | length 2
  Top Layer w0.635: R11.1@-2.394,-34.751 LED1.K@-0.425,-34.751
NetMicroController1_12: MicroController1.12 U41.22 | length 151.3
  Top Layer w0.305: v1(24.45,53.85) 24.45,55.087 25.094,55.731 28.171,55.731 29.478,54.424 31.42,54.424 33.96,51.884 35.241,51.884 37.842,49.283 37.842,49.179 38.594,48.426 38.699,48.426 39.638,47.487 39.638,47.383 40.39,46.63 40.495,46.63 41.434,45.691 41.434,45.587 42.187,44.834 42.291,44.834 43.23,43.895 43.23,43.791 43.983,43.038 44.087,43.038 45.026,42.099 45.026,41.995 47.426,39.594 47.44,39.594 51.629,35.405 51.629,34.17 54.478,31.321 54.478,30.641 54.443,30.606 54.478,30.571 54.478,29.793 56.263,28.007 56.263,25.872 56.23,25.839 56.23,25.619 55.786,25.175 55.786,22.508 56.108,22.187 56.108,17.324 55.848,17.064 v1(55.848,15.585) ; v1(43.5,14.4) 43.5,14.5 44.3,15.3 v1@52.25,15.3
  Top Layer w0.508: -0.49,54.14 0.061,53.589 13.061,53.589 v1(13.217,53.745)
  Top Layer w0.635: U41.22@-5.483,61.741 -5.483,59.133 -0.49,54.14
  Bottom Layer w0.305: MicroController1.12@4.755,14.472 4.755,12.995 5.731,12.019 6.581,12.019 7.173,11.427 7.883,11.427 8.721,10.589 8.721,10.567 9.248,10.04 9.498,10.04 9.526,10.013 10.335,10.013 10.363,10.04 11.614,10.04 11.623,10.032 12.432,10.032 12.441,10.04 14.186,10.04 14.284,9.942 14.913,9.942 14.931,9.924 15.111,9.924 15.227,10.04 16.038,10.04 16.044,10.034 16.854,10.034 16.86,10.04 22.565,10.04 22.762,9.843 23.708,9.843 23.795,9.757 39.828,9.757 43.825,13.754 v1@43.825,14.675 ; v1(52.477,15.714) v1@55.624,15.714
  Bottom Layer w0.508: v1(13.217,53.745) 24.2,53.6 v1@24.3,53.7
NetMicroController1_13: MicroController1.13 R51.1 | length 129.2
  Top Layer w0.254: R51.1@15.119,61.018 16.232,61.018 18.17,59.08 19.352,59.08 20.32,58.113 24.431,58.113 26.342,56.202 28.366,56.202 29.6,54.969 31.542,54.969 34.094,52.417 35.375,52.417 38.313,49.478 38.313,49.374 38.79,48.898 38.894,48.898 40.109,47.682 40.109,47.578 40.586,47.102 40.69,47.102 41.905,45.886 41.905,45.782 42.382,45.306 42.486,45.306 43.701,44.09 43.701,43.986 44.178,43.51 44.282,43.51 45.497,42.294 45.497,42.19 47.622,40.066 47.635,40.066 52.101,35.601 52.101,34.365 54.949,31.516 54.949,29.988 56.735,28.203 56.735,25.677 56.701,25.644 56.701,25.424 56.257,24.98 56.257,22.704 56.579,22.382 56.579,16.477 v1(57.466,15.59) ; v1(45.3,14.2) 45.55,14.45 v1@52.8,14.45
  Bottom Layer w0.254: MicroController1.13@4.255,14.472 4.255,12.645 5.353,11.547 6.385,11.547 6.98,10.952 7.694,10.952 8.252,10.394 8.252,10.189 8.871,9.57 9.304,9.57 9.331,9.543 10.53,9.543 10.557,9.57 11.42,9.57 11.428,9.562 12.627,9.562 12.635,9.57 13.991,9.57 14.089,9.472 14.719,9.472 14.736,9.455 15.306,9.455 15.422,9.57 15.844,9.57 15.85,9.565 17.048,9.565 17.054,9.57 22.371,9.57 22.567,9.374 23.514,9.374 23.603,9.285 40.02,9.285 44.585,13.85 v1@45.35,13.85 ; v1(52.921,13.994) 55.857,13.994 v1@57.092,15.228
NetMicroController1_26: MicroController1.26 P1.2 | length 116.6
  Bottom Layer w0.254: P1.2@-45.184,38.409 P1.2@-44.796,38.796 -44.796,35.898 -42.954,34.055 -38.265,34.055 -37.42,34.9 -34.465,34.9 -33.583,34.018 -33.583,32.826 -34.264,32.145 -47.435,32.145 -48.929,30.651 -50.227,30.651 -55.44,25.438 -55.44,18.015 -54.545,17.12 -43.547,17.12 -36.525,10.098 -32.982,10.098 -32.976,10.104 -32.073,10.104 -31.092,9.123 -31.092,8.792 -30.633,8.333 -30.633,8.263 -30.076,7.705 -30.005,7.705 -29.568,7.267 -28.283,7.267 -28.269,7.281 -26.796,7.281 -26.782,7.267 -26.099,7.267 -25.87,7.497 -23.82,7.497 -23.204,8.112 -22.645,8.112 -19.771,10.986 -11.883,10.986 -9.393,13.476 -9.393,18.523 -8.714,19.202 -5.958,19.202 -5.218,18.461 -5.218,16.992 -4.247,16.022 MicroController1.26@-3.295,16.022
NetMicroController1_35: MicroController1.35 R30.1 | length 154.6
  Top Layer w0.254: v1(-25.134,5.72) -25.134,6.572 -21.595,10.111 -21.595,12.396 -19.762,14.229 v1@-11.595,14.229 ; v1(-13.965,-38.915) -13.662,-38.915 -13.597,-38.85 -15.253,-37.194 -15.253,-33.847 -14.682,-33.276 -9.246,-33.276 -7.078,-35.444 -6.285,-35.444 -5.093,-34.252 -5.093,-34.208 -2.429,-31.543 -2.37,-31.543 -2.055,-31.228 -2.055,-30.73 v1(-1.679,-30.354)
  Bottom Layer w0.254: v1@-25.581,5.605 -26.534,4.651 -26.534,2.114 -26.506,2.086 -26.506,1.298 -27.064,0.74 -27.852,0.74 -28.243,1.131 -28.423,1.131 -28.809,0.744 -28.809,0.088 -29.38,-0.483 -29.38,-1.271 -28.178,-2.474 -28.178,-18.705 -27.23,-19.653 -27.084,-19.653 -21.224,-25.513 ; -21.224,-25.523 -6.509,-25.523 v1(-1.679,-30.354) ; v1@-13.845,-38.686 -13.845,-47.422 R30.1@-11.991,-49.275 ; v1@-11.6,13.698 -12.427,14.525 -22.837,14.525 -25.687,17.375 -25.687,20.441 -24.694,21.434 -21.073,21.434 -20.859,21.22 -7.944,21.22 -7.917,21.193 -7.129,21.193 -7.127,21.194 -6.814,21.194 -6.814,21.193 -6.79,21.193 -6.609,21.374 -5.058,21.374 -4.238,20.555 -3.664,20.555 -3.631,20.522 MicroController1.35@-3.295,20.522
  other v1: -11.703,13.878
NetMicroController1_37: MicroController1.37 R29.1 | length 136.1
  Top Layer w0.254: v1(-5.872,22.427) -3.416,22.427 ; 21.552,24.471 24.108,21.915 24.946,21.915 26.33,20.531 26.33,17.225 v1(25.769,16.665)
  Top Layer w0.305: v1(8.822,-48.957) 13.192,-48.957 14.362,-47.787 14.362,-46.278 v1(15.415,-45.224) ; v1(15.232,-42.753) v1@15.516,-42.469 ; v1(28.564,-33.418) 28.564,-26.156 30.842,-23.878 30.842,6.207 28.787,8.262 v1(28.787,12.861)
  Top Layer w0.5: -3.416,22.427 -0.409,19.419 11.757,19.419 16.809,24.471 21.552,24.471 ; v1@15.516,-42.469 19.453,-42.469 20.79,-41.132 27.314,-41.132 30.682,-37.763 v1(30.682,-35.296)
  Bottom Layer w0.254: v1@-5.872,22.214 v1(-5.872,22.427) -5.305,22.427 -4.4,21.522 MicroController1.37@-3.295,21.522 ; v1@28.239,12.861 v1(28.787,12.861) ; v1@30.626,-35.296 v1(30.682,-35.296)
  Bottom Layer w0.305: R29.1@5.966,-50.75 5.966,-50.083 7.093,-48.957 v1(8.822,-48.957) ; v1(15.415,-45.224) v1@15.415,-42.612 ; v1@25.805,16.508 25.805,15.295 v1@28.239,12.861 ; v1@28.705,-33.376 v1@30.626,-35.296